# Allegro board P1PCB.brd
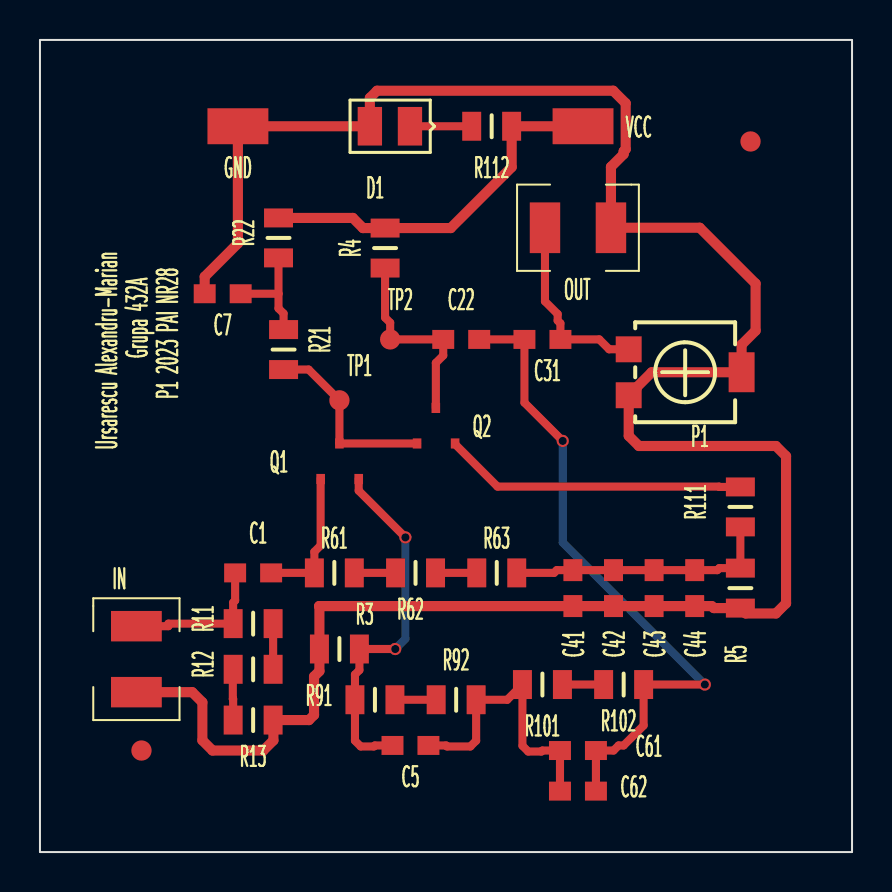
[diagram p0: board, top side]
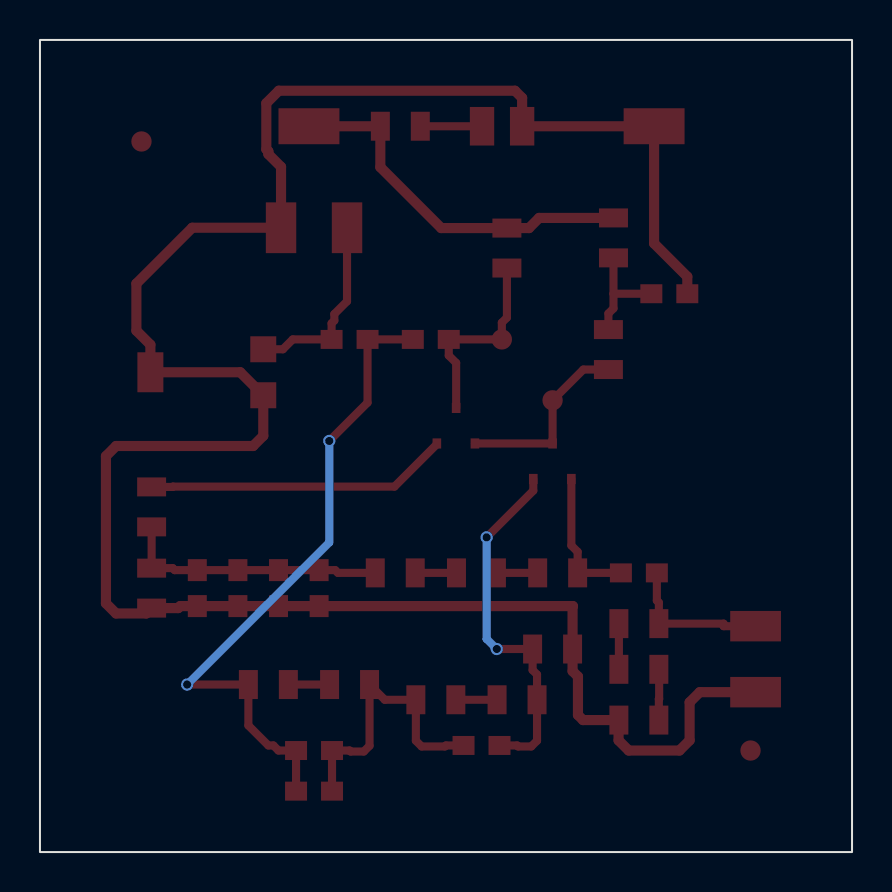
[diagram p1: board, bottom side, seen from below]

Outline 40.64 x 40.64 mm; copper layers: TOP, BOTTOM. Coordinates in mm from the lower left corner of the outline.
Outline path: rectangle 0,0 40.64,40.64

## Design rules (mm)
nets with their own width: min track width 0.406; nets N17678 N17702 N17776 N17790 N17800 N17874 N17886 N17914 N17994 N18018 N18038 N18526 N18532 N18546 N21255 N179421 N180921 N182561
nets with their own width: min track width 0.508; nets 0 VCC

## Placement (name value [footprint] x y rotation side)
C1  4.7u  [CAPC2008X126N_0805]  10.67 13.97 0 top
C5  1n  [CAPC2008X126N_0805]  18.54 5.33 0 top
C7  4.7u  [CAPC2008X126N_0805]  9.14 27.94 0 top
C22  4.7u  [CAPC2008X126N_0805]  21.08 25.65 0 top
C31  4.7u  [CAPC2008X126N_0805]  25.15 25.65 0 top
C41  4.7u  [CAPC2008X126N_0805]  26.67 13.21 90 top
C42  4.7u  [CAPC2008X126N_0805]  28.7 13.21 90 top
C43  4.7u  [CAPC2008X126N_0805]  30.73 13.21 90 top
C44  4.7u  [CAPC2008X126N_0805]  32.77 13.21 90 top
C61  2.2n  [CAPC2008X126N_0805]  26.92 5.08 0 top
C62  2.2n  [CAPC2008X126N_0805]  26.92 3.05 0 top
D1  LED  [SMD080521]  16.51 36.32 180 top
GND  CON1  [SMD_PAD_3-05_1-80]  9.91 36.32 0 top
IN  CON2  [1210RF_WV_12D]  4.83 9.65 90 top
NOREF  -  [unnamed]  35.56 35.56 0 top
NOREF#2  -  [unnamed]  5.08 5.08 0 top
OUT  CON2  [1210RF_WV_12D]  26.92 31.24 0 top
P1  100k  [TS53YL]  29.46 22.86 180 top
Q1  QBC846B  [SOT23]  14.99 19.56 90 top
Q2  QBC846B  [SOT23]  19.81 21.34 90 top
R3  1k  [RES2012X50N_0805]  14.99 10.16 0 top
R4  15k  [RES2012X50N_0805]  17.27 30.23 270 top
R5  1k  [RES2012X50N_0805]  35.05 13.21 270 top
R11  47k  [RES2012X50N_0805]  10.67 11.43 180 top
R12  9.1k  [RES2012X50N_0805]  10.67 9.14 0 top
R13  3.9k  [RES2012X50N_0805]  10.67 6.6 180 top
R21  100k  [RES2012X50N_0805]  12.19 25.15 90 top
R22  100k  [RES2012X50N_0805]  11.94 30.73 90 top
R61  330k  [RES2012X50N_0805]  14.73 13.97 0 top
R62  15k  [RES2012X50N_0805]  18.8 13.97 180 top
R63  15k  [RES2012X50N_0805]  22.86 13.97 180 top
R91  47k  [RES2012X50N_0805]  16.76 7.62 0 top
R92  15k  [RES2012X50N_0805]  20.83 7.62 180 top
R101  510k  [RES2012X50N_0805]  25.15 8.38 0 top
R102  220k  [RES2012X50N_0805]  29.21 8.38 180 top
R111  1  [RES2012X50N_0805]  35.05 17.27 270 top
R112  220  [RES2012X50N_0805]  22.61 36.32 0 top
TP1  CON1  [TP80]  14.99 22.61 0 top
TP2  CON1  [TP80]  17.53 25.65 0 top
VCC  CON1  [SMD_PAD_3-05_1-80]  27.18 36.32 0 top

## Library data of the parts
C1 C5 C7 C22 C31 C41-C44 C61 C62 = C
D1 = LED_0
GND TP1 TP2 VCC = CON1
IN OUT = CON2
P1 = POT
Q1 Q2 = QBC846B_1
R3-R5 R11-R13 R21 R22 R61-R63 R91 R92 R101 R102 R111 R112 = R

## Footprints (pads in the part's own frame, mm; a bottom-side part is the same pattern mirrored in y, then rotated)
1210RF_WV_12D
  rect 1.524x2.54 smd: 1(-1.651,0) 2(1.651,0)
CAPC2008X126N_0805
  rect 1.1x0.95 smd: 1(-0.9,0) 2(0.9,0)
RES2012X50N_0805
  rect 0.95x1.45 smd: 1(-1,0) 2(1,0)
SMD080521
  rect 1.219x1.93 smd: 1(0,0) 2(-2.007,0)
SMD_PAD_3-05_1-80
  rect 3.05x1.8 smd: 1(0,0)
SOT23
  rect 0.508x0.432 smd: 1(-0.889,0.94) 2(-0.889,-0.965) 3(0.889,0)
TP80
  round 1.016 smd: 1(0,0)
TS53YL
  rect 1.3x1.3 smd: 1(0,0) 3(0,-2.3)
  rect 1.3x2 smd: 2(-5.65,-1.15)
unnamed
  round 1.016 smd: 1(0,0)

## Nets
VCC: R4.1 R22.2 R112.2 VCC.1
0: C7.1 C41.1 C42.1 C43.1 C44.1 D1.1 GND.1 IN.1 OUT.2 P1.1 P1.2(T) R3.1 R5.2 R13.1
N17678: C7.2 R21.2 R22.1
N17702: C22.1 Q2.3 R4.2 TP2.1
N17776: C22.2 C31.1 C61.2 C62.2 R102.1
N17790: C31.2 OUT.1 P1.3
N17800: Q1.3 Q2.1 R21.1 TP1.1
N17874: Q2.2(E) R111.1
N17886: C1.2 Q1.1 R61.1
N17914: C5.1 Q1.2(E) R3.2 R91.1
N17994: C41.2 C42.2 C43.2 C44.2 R5.1 R63.1 R111.2
N18018: C1.1 IN.2 R11.2
N18038: R62.1 R63.2
N18526: R91.2 R92.2
N18532: C5.2 C61.1 C62.1 R92.1 R101.1
N18546: R101.2 R102.2
N21255: D1.2 R112.1
N179421: R61.2 R62.2
N180921: R11.1 R12.2
N182561: R12.1 R13.2

Pads without a net: NOREF 1; NOREF#2 1

## Via types
v1: diameter 0.61, hole 0.406, TOP to BOTTOM, 4 vias

## Routing (per net, layer and track width the routed paths; a pad name or vN(x,y) marks a point on that pad's centre or on a via; arc(x,y) is an arc through that point)
VCC: length 18.8
  TOP w0.508: R22.2 15.66,31.73 16.17,31.23 R4.1 20.56,31.23 23.61,34.27 R112.2 VCC.1
0: length 115.9
  TOP w0.508: P1.1 30.61,24.01 P1.2 35.11,25.39 35.81,26.09 35.81,28.45 33.02,31.24 OUT.2 28.57,34.29 29.21,34.92 29.21,35.07 29.31,35.17 29.31,37.47 28.69,38.1 16.87,38.1 16.51,37.74 D1.1 GND.1 9.91,30.46 8.24,28.8 C7.1 ; P1.1 29.46,20.83 29.97,20.32 36.83,20.32 37.34,19.81 37.34,12.45 36.83,11.94 35.32,11.94 R5.2 33.72,12.21 33.62,12.31 C44.1 C43.1 C42.1 C41.1 13.97,12.31 13.99,12.29 R3.1 13.99,9.05 13.72,8.78 13.72,6.86 13.46,6.6 R13.1 11.68,6.59 11.68,5.59 11.18,5.08 8.64,5.08 8.13,5.59 8.13,7.49 7.62,8 IN.1 ; P1.1 29.72,22.86
N17678: length 5.6
  TOP w0.406: R22.1 11.94,27.94 ; 11.94,27.94 11.94,27.21 12.19,26.95 R21.2 ; 11.94,27.94 C7.2
N17702: length 9.9
  TOP w0.406: R4.2 17.27,26.75 17.53,26.49 TP2.1 C22.1 20.18,24.85 19.81,24.48 Q2.3
N17776: length 33.3
  TOP w0.406: C22.2 C31.1 24.25,22.49 v1(26.16,20.57) ; v1(33.27,8.38) R102.1 30.21,6.33 29.21,5.33 28.96,5.33 28.7,5.08 C61.2 C62.2
  BOTTOM w0.406: v1(26.16,20.57) 26.16,15.49 v1(33.27,8.38)
N17790: length 9.5
  TOP w0.406: OUT.1 25.27,27.56 25.91,26.92 25.91,26.6 26.05,26.46 C31.2 27.99,25.65 28.48,25.16 P1.3
N17800: length 9.5
  TOP w0.406: R21.1 13.45,24.15 TP1.1 Q1.3 Q2.1
N17874: length 15.2
  TOP w0.406: Q2.2 20.78,20.41 22.9,18.29 33.98,18.29 34,18.27 R111.1
N17886: length 7
  TOP w0.406: Q1.1 14.05,15.34 13.73,15.03 R61.1 C1.2
N17914: length 18.2
  TOP w0.406: Q1.2 15.95,18.08 v1(18.29,15.75) ; v1(17.78,10.16) R3.2 15.99,9.1 15.76,8.88 R91.1 15.76,5.57 16.05,5.28 16.71,5.28 16.76,5.33 C5.1
  BOTTOM w0.406: v1(18.29,15.75) 18.29,10.67 v1(17.78,10.16)
N17994: length 13.4
  TOP w0.406: R111.2 R5.1 34,14.21 33.9,14.11 C44.2 C43.2 C42.2 C41.2 25.86,14.11 25.73,13.97 R63.1
N18018: length 7.6
  TOP w0.406: C1.1 9.77,12.59 9.67,12.49 R11.2 6.43,11.43 6.43,11.3 4.83,11.3
N18038: length 2.1
  TOP w0.406: R62.1 R63.2
N18526: length 2.1
  TOP w0.406: R91.2 R92.2
N18532: length 14.3
  TOP w0.406: C5.2 20.32,5.33 20.37,5.28 21.54,5.28 21.83,5.57 R92.1 23.38,7.62 R101.1 24.15,5.32 24.43,5.03 25.09,5.03 25.14,5.08 C61.1 C62.1
N18546: length 2.1
  TOP w0.406: R101.2 R102.2
N21255: length 3.1
  TOP w0.406: R112.1 D1.2
N179421: length 2.1
  TOP w0.406: R61.2 R62.2
N180921: length 2.3
  TOP w0.406: R11.1 R12.2
N182561: length 2.6
  TOP w0.406: R13.2 9.67,7.66 9.65,7.66 9.65,9.14 R12.1

## Text on the board
Ref Des/Silkscreen Top: Ursarescu Alexandru-Marian | Grupa 432A | P1 2023 PAI NR28
XSECTION_CHART: *  SURFACE | L1 TOP CONDUCTOR | *  DIELECTRIC | L2 BOTTOM CONDUCTOR | DESIGN CROSS SECTION CHART | ___________________________ | TOTAL THICKNESS 63 MIL
DISPLAY_TOP: FIGURE | FINISHED_SIZE | 16.0 | DRILL CHART: TOP to BOTTOM | ALL UNITS ARE IN MILS | PLATED | QTY | 4
